# Altium PCB Brake By Wire.PcbDoc
Units mm, origin at the board's own origin, x right, y up, seen from the top; angles counter-clockwise.
Board outline 70 x 50 mm, 2 copper layers (Top Layer, Bottom Layer); 14 components, 16 nets, 96 pads, 11 vias.
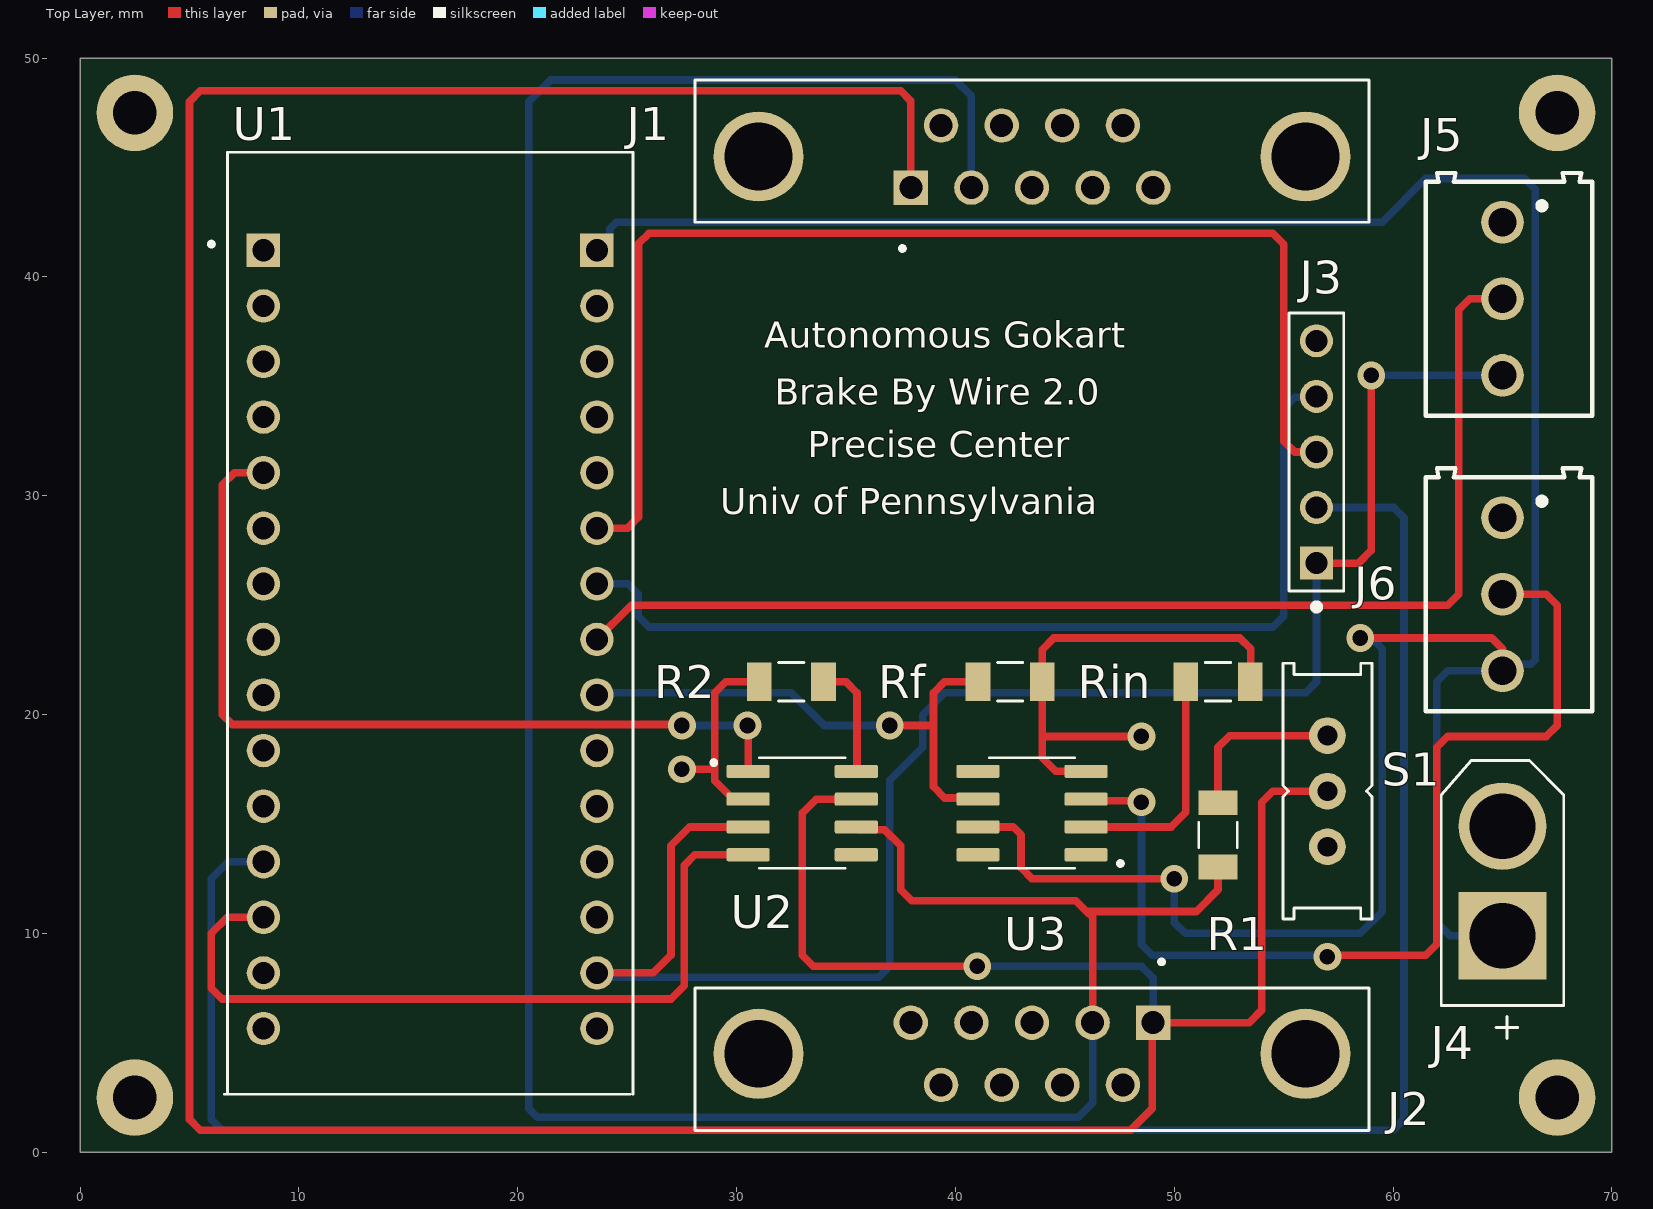
[diagram p0: Top Layer view]
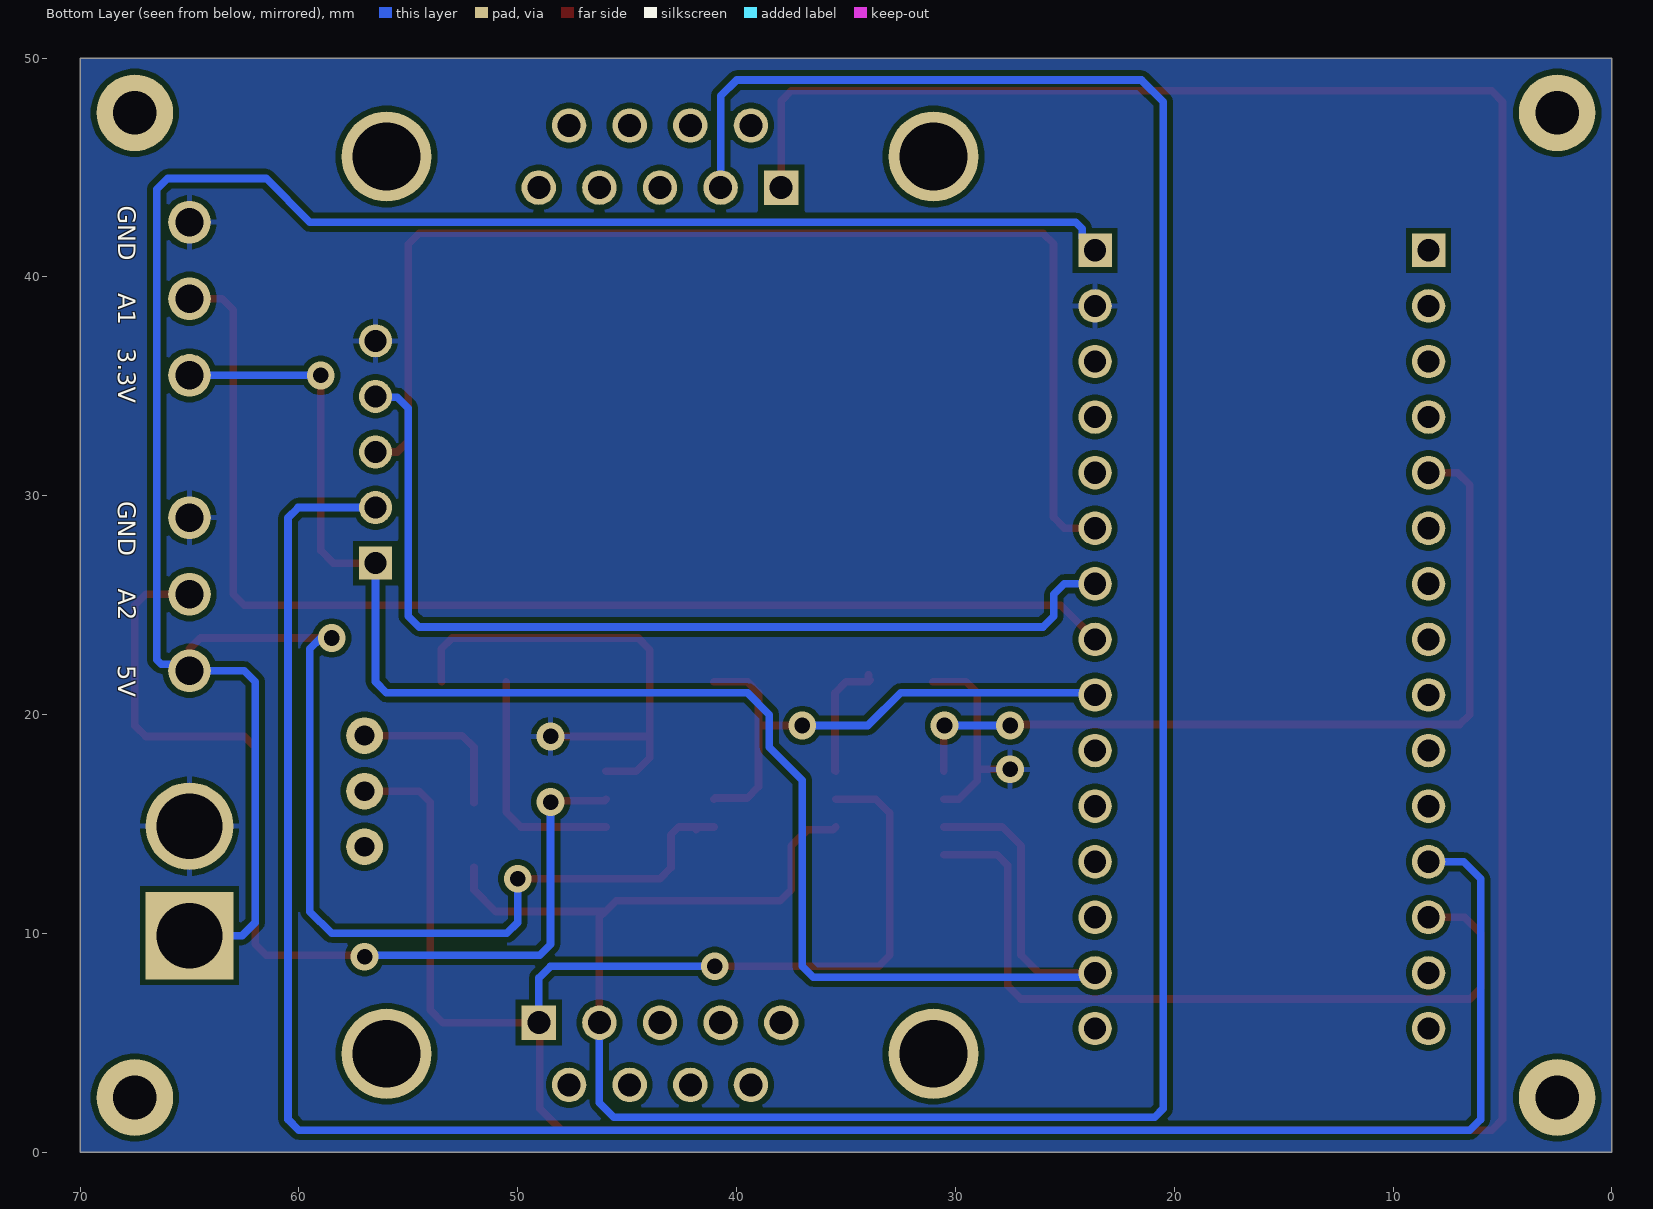
[diagram p1: Bottom Layer view, seen from below]

## Layer stack, top to bottom
Top Solder: solder mask 0.0102, Solder Resist, Dk 3.5
Top Layer: signal copper 0.0356
Dielectric 1: dielectric 0.32, FR-4, Dk 4.8
Bottom Layer: signal copper 0.0356
Bottom Solder: solder mask 0.0102, Solder Resist, Dk 3.5

## Board outline
0,0 0,50 70,50 70,0

## Design rules (kind name [scope] priority, off if disabled: settings)
Clearance [All] p1: gap=0.254 ignorepadtopadclearanceinfootprint=FALSE except(0: Arc-Hole Track-Hole SMDPad-Hole THPad-Hole Via-Hole Fill-Hole Poly-Hole Region-Hole Text-Hole)
HoleSize [All] p1: absolutevalues=TRUE maxlimit=5 minlimit=0.025 maxpercent=80.000 minpercent=20.000
PolygonConnect [All] p1: connectstyle=Relief reliefconductorwidth=0.254 reliefentries=4 polygonreliefangle="90 Angle" airgapwidth=0.254
RoutingVias [All] p1: holewidth=0.711 width=1.27 viastyle="Through Hole" minholewidth=0.711 minwidth=1.27 maxholewidth=0.711 maxwidth=1.27
SolderMaskExpansion [All] p1: expansion=0.102 istentingtop=FALSE
Width [All] p1: maxlimit=0.35 minlimit=0.254 preferedwidth=0.35 minimp=50.000000 maximp=50.000000 favimp=50.000000
29 further rules are at their usual default settings.

## Components (designator, comment, footprint, x,y, rotation, side; value= is the part's Value field where it differs from the comment)
J1 "A-DF_09_A_KG-T2S" ASSMANN_A-DF_09_A_KG-T2S 43.5,45.5 r180 top
J2 "A-DF_09_A_KG-T2S" ASSMANN_A-DF_09_A_KG-T2S 43.5,4.5 r0 top
J3 "826629-5" TE_826629-5 56.5,26.92 r90 top
J4 "XT30-M" AMASS_XT60-M 65,13.5 r90 top
J5 "691214110003" 691214110003 65,39 r270 top
J6 "691214110003" 691214110003 65,25.5 r270 top
R1 "120" RESC3216X65N 52,14.5 r270 top
R2 "10K" RESC3216X65N 32.5,21.5 r180 top
Rf "3600" RESC3216X65N 42.5,21.5 r0 top
Rin "120" RESC3216X65N 52,21.5 r180 top
S1 "EG1218" EG1218 57,16.5 r90 top
U1 "NUCLEO-L432KC" MODULE_NUCLEO-L432KC 16,25 r0 top
U2 "SN65HVD230QDR" SOIC127P599X175-8N 33,15.5 r0 top
U3 "OPA1641AID" SOIC127P599X175-8N 43.5,15.5 r180 top

## Footprints (in the part's own frame and the unit in brackets; to place one, negate y for a bottom-side part, rotate by r counter-clockwise, add the part's x,y. Pads: shape width x height; smd on the part's side, far side on the other; paste and mask are expansions set on the pad)
691214110003 [mm]
  round 1.95 hole 1.3: 1(-3.5,0) 2(0,0) 3(3.5,0)
  silkscreen extent -5.75,-3.5 5.35,4.1
AMASS_XT60-M [mm]
  round 4 hole 3: N(1.4,0)
  rect 4x4 hole 3: P(-3.6,0)
  silkscreen extent -8.3,-2.8 4.4,2.8
ASSMANN_A-DF_09_A_KG-T2S [mm]
  rect 1.575x1.575 / inner round 1.575 / far side rect 1.575x1.575 hole 1.05: 1(5.54,1.42)
  round 1.575 hole 1.05: 2(2.77,1.42) 3(0,1.42) 4(-2.77,1.42) 5(-5.54,1.42) 6(4.155,-1.42) 7(1.385,-1.42) 8(-1.385,-1.42) 9(-4.155,-1.42)
  round 4.116 hole 3.1: S1(-12.495,0) S2(12.495,0)
  silkscreen extent -15.41,-3.5 15.41,4.3
EG1218 [mil]
  round 66 hole 35.43: O(-100,0) P(0,0) S(100,0)
  silkscreen extent -230,-80 230,80
MODULE_NUCLEO-L432KC [mm]
  rect 1.53x1.53 hole 1.02: CN3_1(-7.62,16.215) CN4_1(7.62,16.215)
  round 1.53 hole 1.02: CN3_2(-7.62,13.675) CN3_3(-7.62,11.135) CN3_4(-7.62,8.595) CN3_5(-7.62,6.055) CN3_6(-7.62,3.515) CN3_7(-7.62,0.975) CN3_8(-7.62,-1.565) CN3_9(-7.62,-4.105) CN3_10(-7.62,-6.645) CN3_11(-7.62,-9.185) CN3_12(-7.62,-11.725) CN3_13(-7.62,-14.265) CN3_14(-7.62,-16.805) CN3_15(-7.62,-19.345) CN4_2(7.62,13.675) CN4_3(7.62,11.135) CN4_4(7.62,8.595) CN4_5(7.62,6.055) CN4_6(7.62,3.515) CN4_7(7.62,0.975) CN4_8(7.62,-1.565) CN4_9(7.62,-4.105) CN4_10(7.62,-6.645) CN4_11(7.62,-9.185) CN4_12(7.62,-11.725) CN4_13(7.62,-14.265) CN4_14(7.62,-16.805) CN4_15(7.62,-19.345)
  silkscreen extent -10.1,-22.35 9.27,20.7
RESC3216X65N [mm]
  rect 1.13x1.77 smd: 1(-1.47,0) 2(1.47,0)
  silkscreen extent -0.58,-0.88 0.58,0.88
SOIC127P599X175-8N [mm]
  rrect25% 1.97x0.6 smd: 1(-2.47,1.905) 2(-2.47,0.635) 3(-2.47,-0.635) 4(-2.47,-1.905) 5(2.47,-1.905) 6(2.47,-0.635) 7(2.47,0.635) 8(2.47,1.905)
  silkscreen extent -4.14,-2.52 1.95,2.52, body extent -3,-2.45 3,2.45, height 1.75
TE_826629-5 [mm]
  rect 1.508x1.508 hole 1: 1(0,0)
  round 1.508 hole 1: 2(2.54,0) 3(5.08,0) 4(7.62,0) 5(10.16,0)
  silkscreen extent -2.15,-1.25 11.43,1.25

## Part data
J1 J2: "9 Position D-Sub Receptacle, Female Sockets Connector", Package=None, Availability="In Stock", Check_prices=https://www.snapeda.com/parts/A-DF%2009%20A/KG-T2S/Assmann+WSW+Components/view-part/?ref=eda, MF="Assmann WSW", MP="A-DF 09 A/KG-T2S", Price=None, Purchase-URL="https://pricing.snapeda.com/search/part/A-DF 09 A/KG-T2S/?ref=eda", SnapEDA_Link=https://www.snapeda.com/parts/A-DF%2009%20A/KG-T2S/Assmann+WSW+Components/view-part/?ref=snap
J3: "Board-To-Board Connector, AMPMODU MOD II Series, Through Hole, Header, 5, 2.54 mm", Package=None, Availability=Unavailable, Centerline_Pitch="2.54 mm[.1 in]", EU_RoHS_Compliance=Compliant, MF="TE Connectivity", MP=826629-5, Number_of_Positions=5, Price=None, Product_Type=Connector, SnapEDA_Link=https://www.snapeda.com/parts/826629-5/TE%20Connectivity%20AMP%20Connectors/view-part/905319/?ref=snap, TE_purchase_URL=https://www.te.com/usa-en/product-826629-5.html?te_bu=Cor&te_type=disp&te_campaign=seda_glo_cor-seda-global-disp-prtnr-fy19-seda-model-bom-cta_sma-317_1&elqCampaignId=32493
J4: "Plug; DC supply; XT60; male; PIN: 2; for cable; soldered; 30A; 500V", Package=Package, Availability="Not in stock", Check_prices=https://www.snapeda.com/parts/XT60-M/AMASS/view-part/?ref=eda, MF=AMASS, MP=XT60-M, Price=None, SnapEDA_Link=https://www.snapeda.com/parts/XT60-M/AMASS/view-part/?ref=snap
J5 J6: "PCB Terminal Block [WÃ¼rth Elektronik] 691214110003 PCB Terminal Block", Package=None, Availability="In Stock", Check_prices=https://www.snapeda.com/parts/691214110003/Wurth+Electronics+Inc./view-part/?ref=eda, MF="Wurth Electronics", MP=691214110003, Price=None, Purchase-URL=https://pricing.snapeda.com/search/part/691214110003/?ref=eda, SnapEDA_Link=https://www.snapeda.com/parts/691214110003/Wurth+Electronics+Inc./view-part/?ref=snap
R1 R2 Rf Rin: library part KTR18EZPF9530, Package=None, Availability=Unavailable, MP=KTR18EZPF9530, Price=None
S1: "<b>SLIDING SWITCH</b><p> 0.1\" spacing through hole, vertical SPDT slide switch <p>http://www.ladyada.net/library/pcb/eaglelibrary.html</p>", Package=None, Availability=Unavailable, MP=EG1218, Price=None
U1: "STM32 Nucleo-32 development board with STM32L432KC MCU, supports Arduino connectivity", Package=None, Availability=Unavailable, MP=NUCLEO-L432KC, Price=None
U2: "3.3-V CAN Transceiver with Standby Mode 8-SOIC -40 to 125", Package="SOIC-8 Texas Instruments", Availability=Good, Check_prices=https://www.snapeda.com/parts/SN65HVD230QDR/Texas%20Instruments/view-part/1178075/?ref=eda, MF="Texas Instruments", MP=SN65HVD230QDR, Price=None, Purchase-URL=https://pricing.snapeda.com/search/part/SN65HVD230QDR/?ref=eda, SnapEDA_Link=https://www.snapeda.com/parts/SN65HVD230QDR/Texas%20Instruments/view-part/1178075/?ref=snap
U3: "Single Sound-Plus High-Performance, JFET-Input Audio OpAmps 8-SOIC -40 to 85", Package="SOIC-8 Texas Instruments", Check_prices=https://www.snapeda.com/parts/OPA1641AID/Texas%20Instruments/view-part/1237742/?ref=eda, Digi-Key_Part_Number=296-48624-2-ND, MF="Texas Instruments", MP=OPA1641AID, Purchase-URL=https://pricing.snapeda.com/search/part/OPA1641AID/?ref=eda, SnapEDA_Link=https://www.snapeda.com/parts/OPA1641AID/Texas%20Instruments/view-part/1237742/?ref=snap

## Free pads (board coordinates)
  round 3.5 hole 2: 1(2.5,2.5) 2(67.5,2.5) 3(67.5,47.5) 4(2.5,47.5)

## Via types
v1: diameter 1.27, hole 0.711, Top Layer to Bottom Layer, 11 vias

## Nets (pads, with @x,y where several pads share a name; then routed paths per layer and width w, separated by ;. In a path a pad name is that pad's centre, name@x,y a point inside that pad or via, vN(x,y) a via of type N, cw(c..) or ccw(c..) an arc to the next point about the centre after c; other vN are vias at no path point)
3.3V: J3.1 J5.3 U1.CN4_14 U2.3 | length 79.2
  Top Layer w0.35: U1.CN4_14 26.195,8.195 27,9 27,14 27.865,14.865 U2.3 ; J3.1 58.42,26.92 59,27.5 v1(59,35.5)
  Bottom Layer w0.35: U1.CN4_14 23.815,8 36.5,8 37,8.5 37,17 38.5,18.5 38.5,20 39.5,21 56,21 56.5,21.5 J3.1 ; v1(59,35.5) J5.3
5V: J4.P J6.3 U1.CN4_1 U3.7 | length 128.9
  Top Layer w0.35: U3.7 U3.7@41.715,14.865 ; U3.7@41.84,14.74 U3.7@41.715,14.865 ; v1(50,12.5) 43.5,12.5 43,13 43,14.5 42.635,14.865 U3.7@41.715,14.865 ; v1(58.5,23.5) 64.5,23.5 65,23 J6.3
  Bottom Layer w0.35: U1.CN4_1 24.204,41.799 24.204,42.204 24.5,42.5 59.5,42.5 61.5,44.5 66,44.5 66.5,44 66.5,22.511 66.295,22.306 65.306,22.306 J6.3 62.5,22 62,21.5 62,10.5 62.6,9.9 J4.P ; v1(50,12.5) 50,10.5 50.5,10 58.5,10 59.5,11 59.5,23 v1@59,23.5
Analog_1: J5.2 U1.CN4_8 | length 55.4
  Top Layer w0.35: U1.CN4_8 25.185,25 62.5,25 63,25.5 63,38.5 63.5,39 J5.2
Analog_2: Rf.1 U1.CN4_9 U3.6 | length 24.8
  Top Layer w0.35: v1(37,19.5) 39,19.5 ; U3.6 40.98,16.185 39.52,16.185 39,16.705 39,19.5 ; Rf.1 39.5,21.5 39,21 39,19.5
  Bottom Layer w0.35: U1.CN4_9 23.725,21 32.5,21 34,19.5 v1(37,19.5)
"Analog_2 _IN": J6.2 U3.3 | length 46.2
  Top Layer w0.35: U3.3 46.037,16.068 48.432,16.068 v1(48.5,16) ; v1(57,8.936) 57.064,9 61.5,9 62,9.5 62,18.5 62.5,19 67,19 67.5,19.5 67.5,25 67,25.5 J6.2
  Bottom Layer w0.35: v1(48.5,16) 48.5,9.5 49,9 56.936,9 v1(57,8.936)
CAN_HIGH: J1.1 J2.1 S1.P U2.7 | length 178
  Top Layer w0.35: U2.7 33.635,16.135 33,15.5 33,9 33.5,8.5 v1(41,8.5) ; J1.1 37.96,48.04 37.5,48.5 5.5,48.5 5,48 5,1.5 5.5,1 48,1 49,2 49,5.88 J2.1 53.42,5.92 54,6.5 54,16 54.5,16.5 S1.P
  Bottom Layer w0.35: v1(41,8.5) 48.5,8.5 49.04,7.96 J2.1
CAN_LOW: J1.2 J2.2 R1.2 U2.6 | length 126.9
  Top Layer w0.35: U2.6 35.595,14.74 36.76,14.74 37.5,14 37.5,12 38,11.5 45.5,11.5 46,11 ; J2.2 46.27,10.73 46,11 ; R1.2 52,12 51,11 46,11
  Bottom Layer w0.35: J1.2 40.73,48.27 40,49 21.5,49 20.5,48 20.5,2 20.896,1.604 45.604,1.604 46.27,2.27 J2.2
CAN_RX: U1.CN3_13 U2.4 | length 35.9
  Top Layer w0.35: U1.CN3_13 6.735,10.735 6,10 6,7.5 6.5,7 27,7 27.604,7.604 27.604,13.104 28.095,13.595 U2.4
CAN_TX: U1.CN3_5 U2.1 | length 38.9
  Top Layer w0.35: U1.CN3_5 7.055,31.055 6.5,30.5 6.5,20 6.951,19.549 27.451,19.549 v1(27.5,19.5) ; U2.1 v1@30.53,19.47
  Bottom Layer w0.35: v1(27.5,19.5) v1(30.5,19.5)
ENABLE: J3.2 U1.CN3_12 | length 100.3
  Bottom Layer w0.35: U1.CN3_12 6.775,13.275 6,12.5 6,1.5 6.5,1 60,1 60.5,1.5 60.5,29 60.04,29.46 J3.2
GND: J3.5 J4.N J5.1 J6.1 R2.2 Rf.2 Rin.1 U1.CN4_2 U2.2 U3.4 | length 32.8
  Top Layer w0.35: v1(27.5,17.5) 29,17.5 ; U2.2 29.845,16.135 29,16.98 29,17.5 ; R2.2 29.5,21.5 29,21 29,17.5 ; U3.4 44.595,17.405 43.97,18.03 43.97,19 ; v1(48.5,19) 43.97,19 ; Rin.1 53.5,21.53 53.5,23 53,23.5 44.5,23.5 43.97,22.97 Rf.2 43.97,19
NetR1_1: R1.1 S1.S | length 7.8
  Top Layer w0.35: R1.1 52,18.5 52.54,19.04 S1.S
NetR2_1: R2.1 U2.8 | length 5.8
  Top Layer w0.35: R2.1@33.905,21.565 R2.1 ; R2.1@33.97,21.82 R2.1 ; U2.8 35.5,17.435 35.5,21 35,21.5 R2.1
NetRin_2: Rin.2 U3.2 | length 10.8
  Top Layer w0.35: U3.2 49.865,14.865 50.53,15.53 Rin.2
OUT1: J3.3 U1.CN4_6 | length 55.2
  Top Layer w0.35: U1.CN4_6 25.015,28.515 25.515,29.015 25.515,41.515 26,42 54.5,42 55,41.5 55,32.5 55.5,32 J3.3
OUT2: J3.4 U1.CN4_7 | length 44.2
  Bottom Layer w0.35: U1.CN4_7 25.025,25.975 25.5,25.5 25.5,24.5 26,24 54.5,24 55,24.5 55,34 55.5,34.5 56.46,34.5 J3.4
pads on no net: J1.3 J1.4 J1.5 J1.6 J1.7 J1.8 J1.9 J1.S1 J1.S2 J2.3 J2.4 J2.5 J2.6 J2.7 J2.8 J2.9 J2.S1 J2.S2 S1.O U1.CN3_1 U1.CN3_2 U1.CN3_3 U1.CN3_4 U1.CN3_6 U1.CN3_7 U1.CN3_8 U1.CN3_9 U1.CN3_10 U1.CN3_11 U1.CN3_14 U1.CN3_15 U1.CN4_3 U1.CN4_4 U1.CN4_5 U1.CN4_10 U1.CN4_11 U1.CN4_12 U1.CN4_13 U1.CN4_15 U2.5 U3.1 U3.5 U3.8

## Polygon pours and split planes (outlines as drawn)
GND on Bottom Layer "NONET_L02_P-001" (solid, pour order 0): 0,50 70,50 70,0 0,0

## Silkscreen, mask and mechanical layers (free items; w line width, h text height)
Top Overlay:
  text "Autonomous Gokart" at 31.254,36.754 h1.2
  text "Brake By Wire 2.0" at 31.754,34.154 h1.2
  text "Precise Center" at 33.254,31.754 h1.2
  text "Univ of Pennsylvania" at 29.254,29.154 h1.2
Bottom Overlay:
  text "GND" at 68.246,43.246 h0.8 r90
  text "A1" at 68.246,39.246 h0.8 r90
  text "3.3V" at 68.246,36.746 h0.8 r90
  text "GND" at 68.246,29.746 h0.8 r90
  text "A2" at 68.246,25.746 h0.8 r90
  text "5V" at 68.246,22.246 h0.8 r90
Mechanical 1:
  lines w0.001: 0,0 70,0 ; 0,0 0,50 ; 0,0 70,0 ; 0,0 0,50 ; 0,50 70,50 ; 0,50 70,50 ; 70,0 70,50 ; 70,0 70,50
  lines w0.254: 0,0 70,0 70,50 0,50 0,0